# EAGLE board ACC (EAGLE 9.3.0)
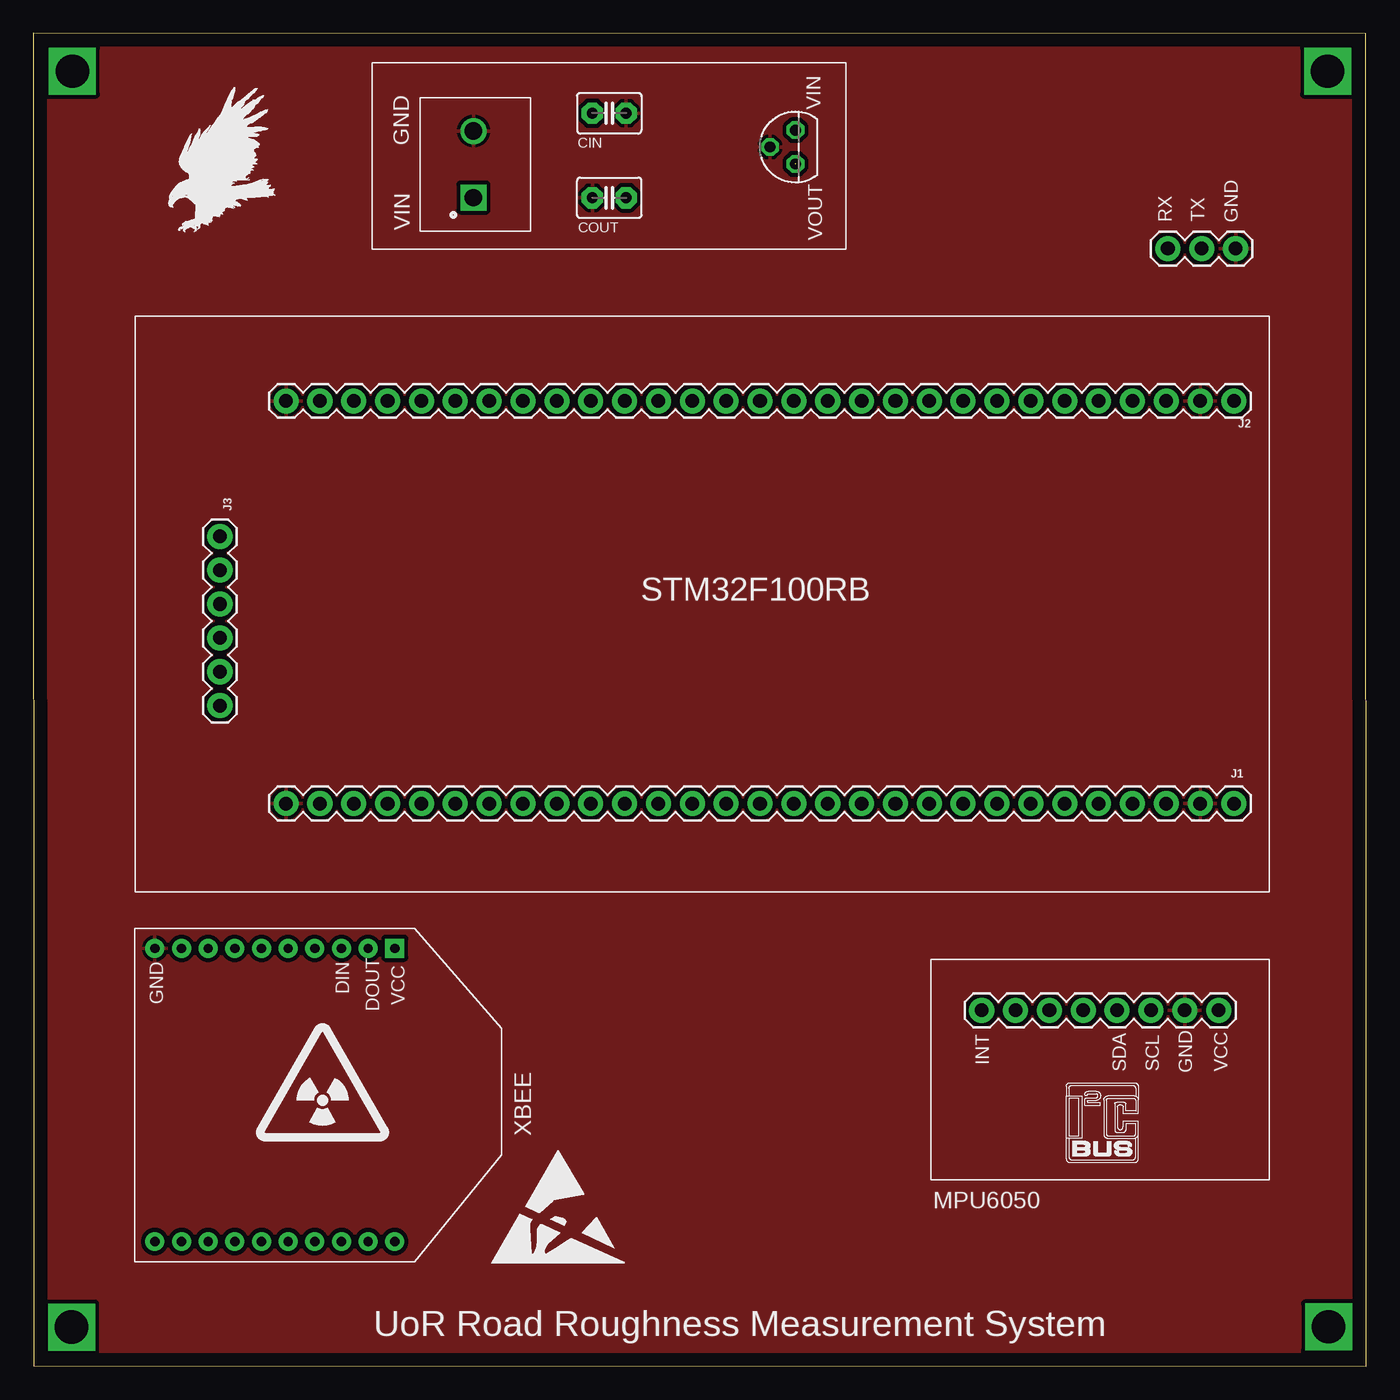
[diagram p0: board, top side]
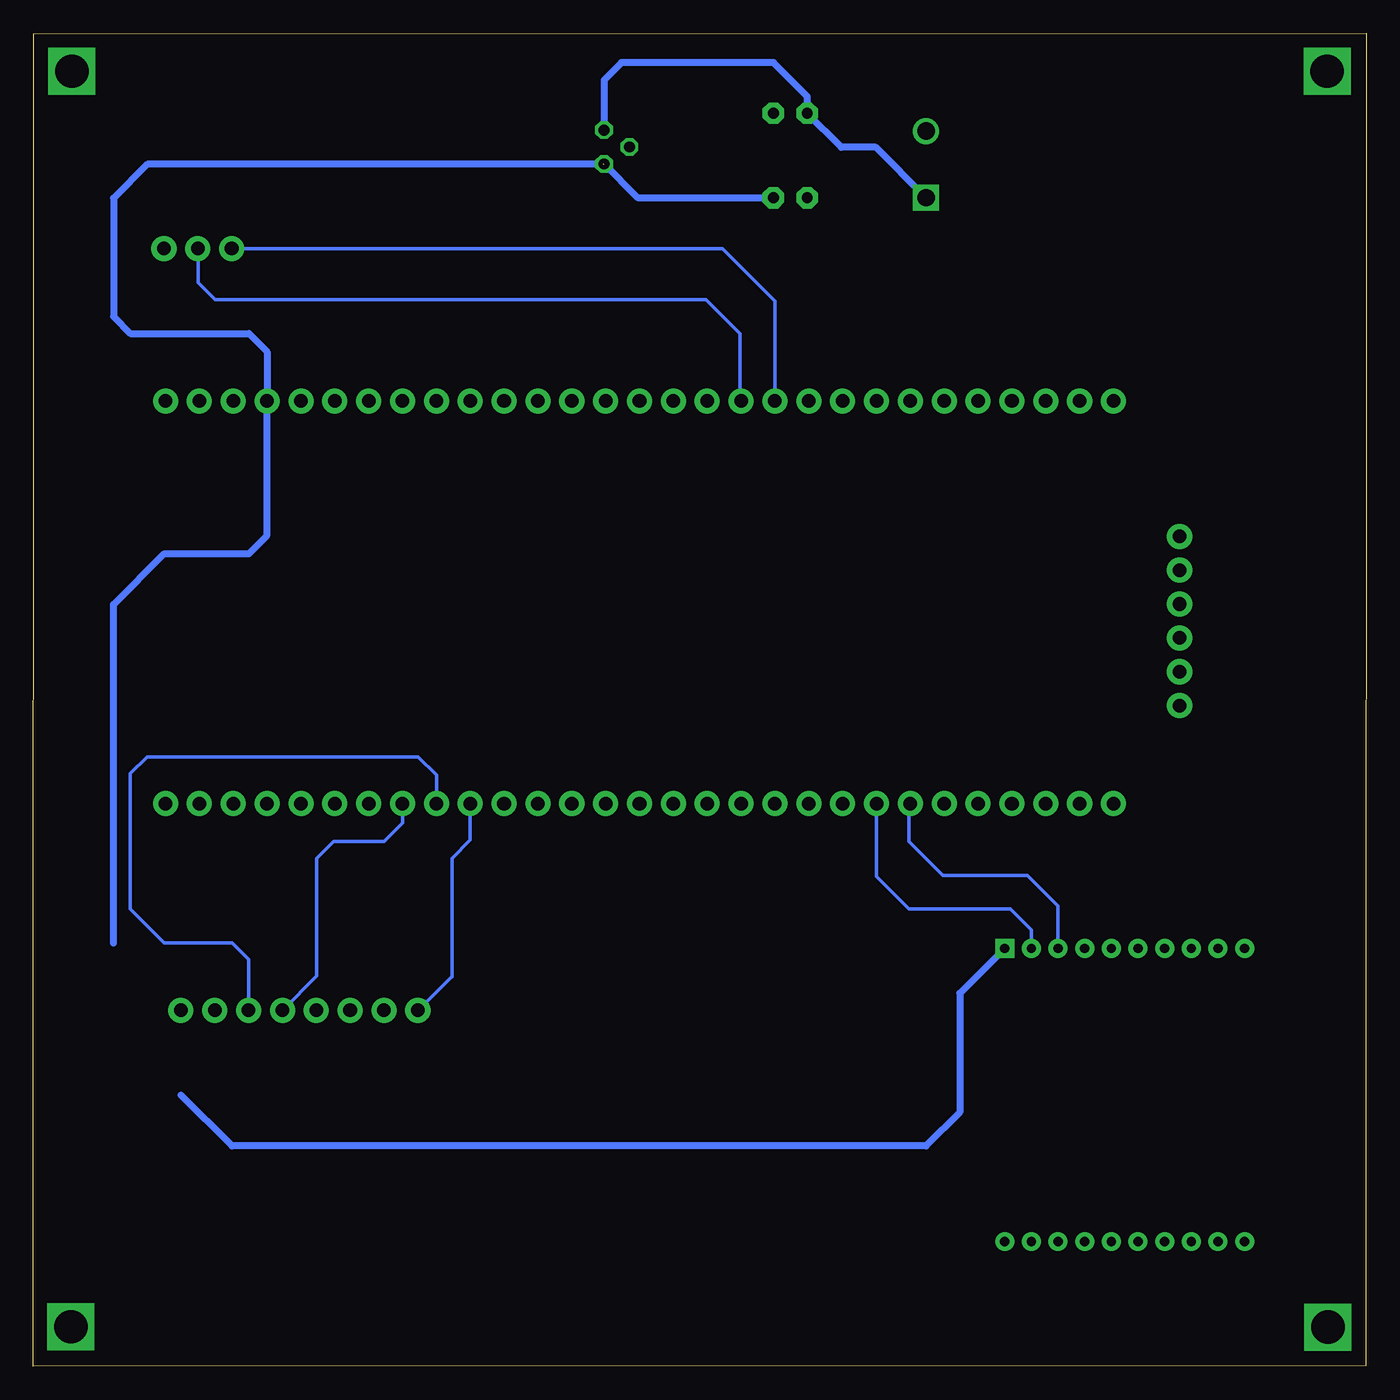
[diagram p1: board, bottom side, seen from below]

Size 100 x 100 mm. Coordinates in mm from the lower left corner, seen from the top.
Outline: 0.03,0.03 100,0 99.97,99.97 0,100 0.03,0.03
Copper layers (1*16): Top 0.035mm / dielectric 1.53mm / Bottom 0.035mm
Design rules "default *": minimum track width 6mil, minimum drill 0.35mm, track to track 6mil, track to pad 6mil, pad to pad 6mil, via to via 6mil, smd to smd 6mil, copper to edge 40mil, drill to drill 6mil, minimum pad ring 10mil, minimum via ring 8mil, stop-mask expansion 4mil, vias tented up to drill 0mil, thermal gap 10mil

## Footprints (pad centres in the part's own frame; a part is rotated, then mirrored left to right if it is on the bottom)
C2.5-3 = drill 0.813 pad 1.6 octagon: 1 -1.27,0; 2 1.27,0
1X29 = drill 1.016 pad 1.88: 1 0,0; 2 2.54,0; 3 5.08,0; 4 7.62,0; 5 10.16,0; 6 12.7,0; 7 15.24,0; 8 17.78,0; 9 20.32,0; 10 22.86,0; 11 25.4,0; 12 27.94,0; 13 30.48,0; 14 33.02,0; 15 35.56,0; 16 38.1,0; 17 40.64,0; 18 43.18,0; 19 45.72,0; 20 48.26,0; 21 50.8,0; 22 53.34,0; 23 55.88,0; 24 58.42,0; 25 60.96,0; 26 63.5,0; 27 66.04,0; 28 68.58,0; 29 71.12,0
1X06 = drill 1.016 pad 1.88: 1 0,0; 2 2.54,0; 3 5.08,0; 4 7.62,0; 5 10.16,0; 6 12.7,0
PHOENIX_1935161 = drill 1.3 square: 1 -2.5,0 | drill 1.3: 2 2.5,0
1X03 = drill 1.016 pad 1.88: 1 0,0; 2 2.54,0; 3 5.08,0
1X08 = drill 1.016 pad 1.88: 1 0,0; 2 2.54,0; 3 5.08,0; 4 7.62,0; 5 10.16,0; 6 12.7,0; 7 15.24,0; 8 17.78,0
TO92 = drill 0.813 octagon: 1 -1.27,0; 2 0,1.905; 3 1.27,0
XBEE = drill 0.7 pad 1.422 square: 1 -11,5.5 | drill 0.7 pad 1.422: 2 -11,3.5; 3 -11,1.5; 4 -11,-0.5; 5 -11,-2.5; 6 -11,-4.5; 7 -11,-6.5; 8 -11,-8.5; 9 -11,-10.5; 10 -11,-12.5; 11 11,-12.5; 12 11,-10.5; 13 11,-8.5; 14 11,-6.5; 15 11,-4.5; 16 11,-2.5; 17 11,-0.5; 18 11,1.5; 19 11,3.5; 20 11,5.5

## Placement (x,y rotation side)
CIN  1uF  [C2.5-3]  43.21,94.01 0 top
COUT  2.2uF  [C2.5-3]  43.21,87.66 180 top
J1  [1X29]  90.08,42.21 180 top
J2  [1X29]  90.08,72.42 180 top
J3  [1X06]  14,62.26 270 top
J4  1935161  [PHOENIX_1935161]  33.02,90.17 90 top
J5  [1X03]  90.2,83.85 180 top
MPU6050  [1X08]  71.15,26.7 0 top
U$2  [EAGLE-PLC-8MM]  10.16,85.09 0 top
U$3  [ESD_10.00]  34.29,7.62 0 top
U$5  [I2C]  77.47,15.24 0 top
U$6  [RADIOACTIVE_10.00]  16.47,16.86 0 top
VOLTAGE_REGULATOR  LP2950Z  [TO92]  57.18,91.47 90 top
XBEE  XBEE  [XBEE]  21.62,20.35 270 top

## Library data of the parts
CIN COUT = capacitor-wima
J1 J2 J5 = SparkFun-Connectors
J3 = SparkFun-Connectors; PROD_ID: CONN-08437
J4 = 1935161; DESCRIPTION: Conn Terminal Blocks 2 POS 5mm Solder ST Thru-Hole 16A; DIGI-KEY_PART_NUMBER: 277-1667-ND; DIGI-KEY_PURCHASE_URL: https://www.digikey.com/product-detail/en/phoenix-contact/1935161/277-1667-ND/568614?utm_source=snapeda&utm_medium=aggregator&utm_campaign=symbol; MF: Phoenix Contact; MP: 1935161; SPICEPREFIX: B
MPU6050 = SparkFun-Connectors; PROD_ID: CONN-08438
U$2 U$3 U$6 = logo
U$5 = micro-philips
VOLTAGE_REGULATOR = linear
XBEE = adafruit

## Nets
3V3: COUT.1 J2.4 VOLTAGE_REGULATOR.1
5V: J1.4
ADD: MPU6050.2
BOOT: J1.7
GND: CIN.2 COUT.2 J1.2 J1.29 J2.2 J2.29 J4.2 J5.1 MPU6050.7 VOLTAGE_REGULATOR.2 XBEE.10
N$1: MPU6050.8
N$3: J1.1
N$31: J2.26
NC: J1.3
NC1: J2.3
PA0: J2.16
PA1: J2.17
PA2: J2.18 J5.2
PA3: J2.19 J5.3
PA4: J2.20
PA5: J2.21
PA6: J2.22
PA7: J2.23
PA8: J1.24
PA9: J1.23 XBEE.3
PA10: J1.22 XBEE.2
PA11: J1.21
PA12: J1.20
PA13: J1.19
PA14: J1.18
PA15: J1.17
PB1: J2.27
PB2: J2.28
PB3: J1.12
PB4: J1.11
PB5: J1.10 MPU6050.1
PB6: J1.9 MPU6050.6
PB7: J1.8 MPU6050.5
PB8: J1.6
PB9: J1.5
PB10: J3.1
PB11: J3.2
PB12: J3.3
PB13: J3.4
PB14: J3.5
PB15: J3.6
PC0: J2.12
PC1: J2.13
PC2: J2.14
PC3: J2.15
PC4: J2.24
PC5: J2.25
PC6: J1.28
PC7: J1.27
PC8: J1.26
PC9: J1.25
PC10: J1.16
PC11: J1.15
PC12: J1.14
PC13: J2.6
PC14: J2.7
PC15: J2.8
PD0: J2.9
PD1: J2.10
PD2: J1.13
RST: J2.11
VBAT: J2.5
VCC: XBEE.1
VIN: CIN.1 J4.1 VOLTAGE_REGULATOR.3
XCL: MPU6050.3
XDA: MPU6050.4

## Tracks (layer width: path | path; a pad name or v marks a point on that pad's centre or on a via)
3V3  (1 unrouted)
  Bottom 0.508: 93.98,31.75 93.98,57.15 90.17,60.96 83.82,60.96 82.46,62.33 J2.4 82.46,76.11 83.82,77.47 92.71,77.47 93.98,78.74 93.98,87.63 91.44,90.17 57.21,90.17 | VOLTAGE_REGULATOR.1 54.61,87.63 44.51,87.63 COUT.1 44.45,87.63
GND
  pour Top (isolate 0.305): 0,100 100,100 100,0 0,0
N$4  (via drill 2.5)
  other vias: 2.93,97.16
N$5  (via drill 2.5)
  other vias: 97.11,97.16
N$6  (via drill 2.5)
  other vias: 2.87,2.93
N$7  (via drill 2.5)
  other vias: 97.19,2.95
PA2
  Bottom 0.254: J2.18 46.99,72.51 46.99,77.47 49.53,80.01 86.36,80.01 87.63,81.28 87.63,83.82 J5.2
PA3
  Bottom 0.254: J2.19 44.36,79.92 48.29,83.85 J5.3
PA9
  Bottom 0.254: XBEE.3 23.12,34.55 25.4,36.83 31.75,36.83 34.29,39.37 34.29,42.12 J1.23
PA10
  Bottom 0.254: J1.22 36.74,36.74 34.29,34.29 26.68,34.29 25.12,32.73 XBEE.2
PB5
  Bottom 0.254: MPU6050.1 68.64,29.21 68.58,29.21 68.58,38.1 67.22,39.47 J1.10
PB6
  Bottom 0.254: MPU6050.6 83.85,30.51 85.09,31.75 90.17,31.75 92.71,34.29 92.71,44.45 91.44,45.72 71.12,45.72 69.76,44.36 J1.9
PB7
  Bottom 0.254: MPU6050.5 78.74,29.27 78.74,38.1 77.47,39.37 73.66,39.37 72.3,40.74 J1.8
VCC
  Bottom 0.508: XBEE.1 30.48,27.99 30.48,19.05 33.02,16.51 85.09,16.51 88.93,20.35
VIN
  Bottom 0.508: VOLTAGE_REGULATOR.3 57.18,96.5 55.88,97.79 44.45,97.79 41.94,95.28 CIN.1 39.37,91.44 36.79,91.44 J4.1

## Text on the board
tNames: VIN | GND | VIN | RX | TX | GND | VOUT | STM32F100RB | DIN | GND | DOUT | VCC | INT | SDA | SCL | GND | VCC | UoR Road Roughness Measurement System